# Altium PCB panel.PcbDoc
Units mm, origin at the board's own origin, x right, y up, seen from the top; angles counter-clockwise.
Board outline 51.11 x 36.66 mm, 2 copper layers (Top Layer, Bottom Layer); 23 components, 26 nets, 97 pads, 2 vias.
Unrouted connection lines stored in the file: 1.
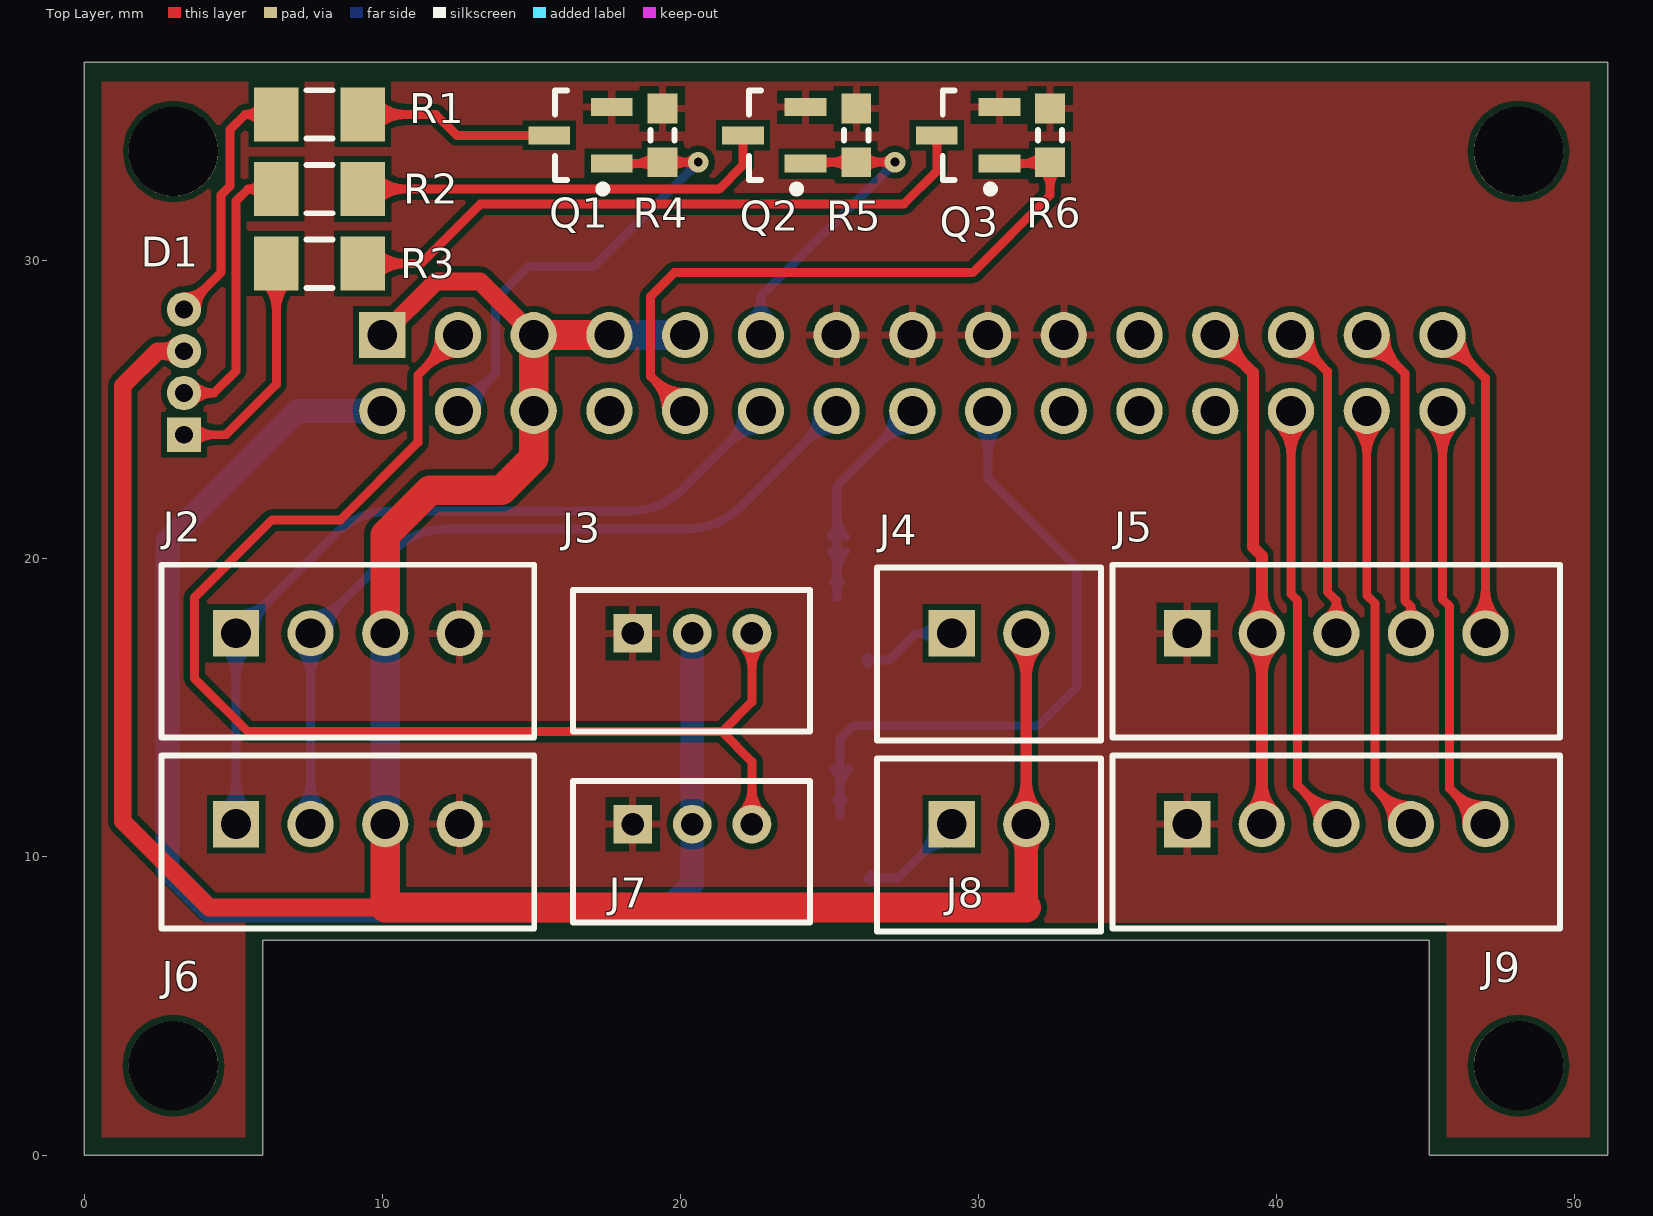
[diagram p0: Top Layer view]
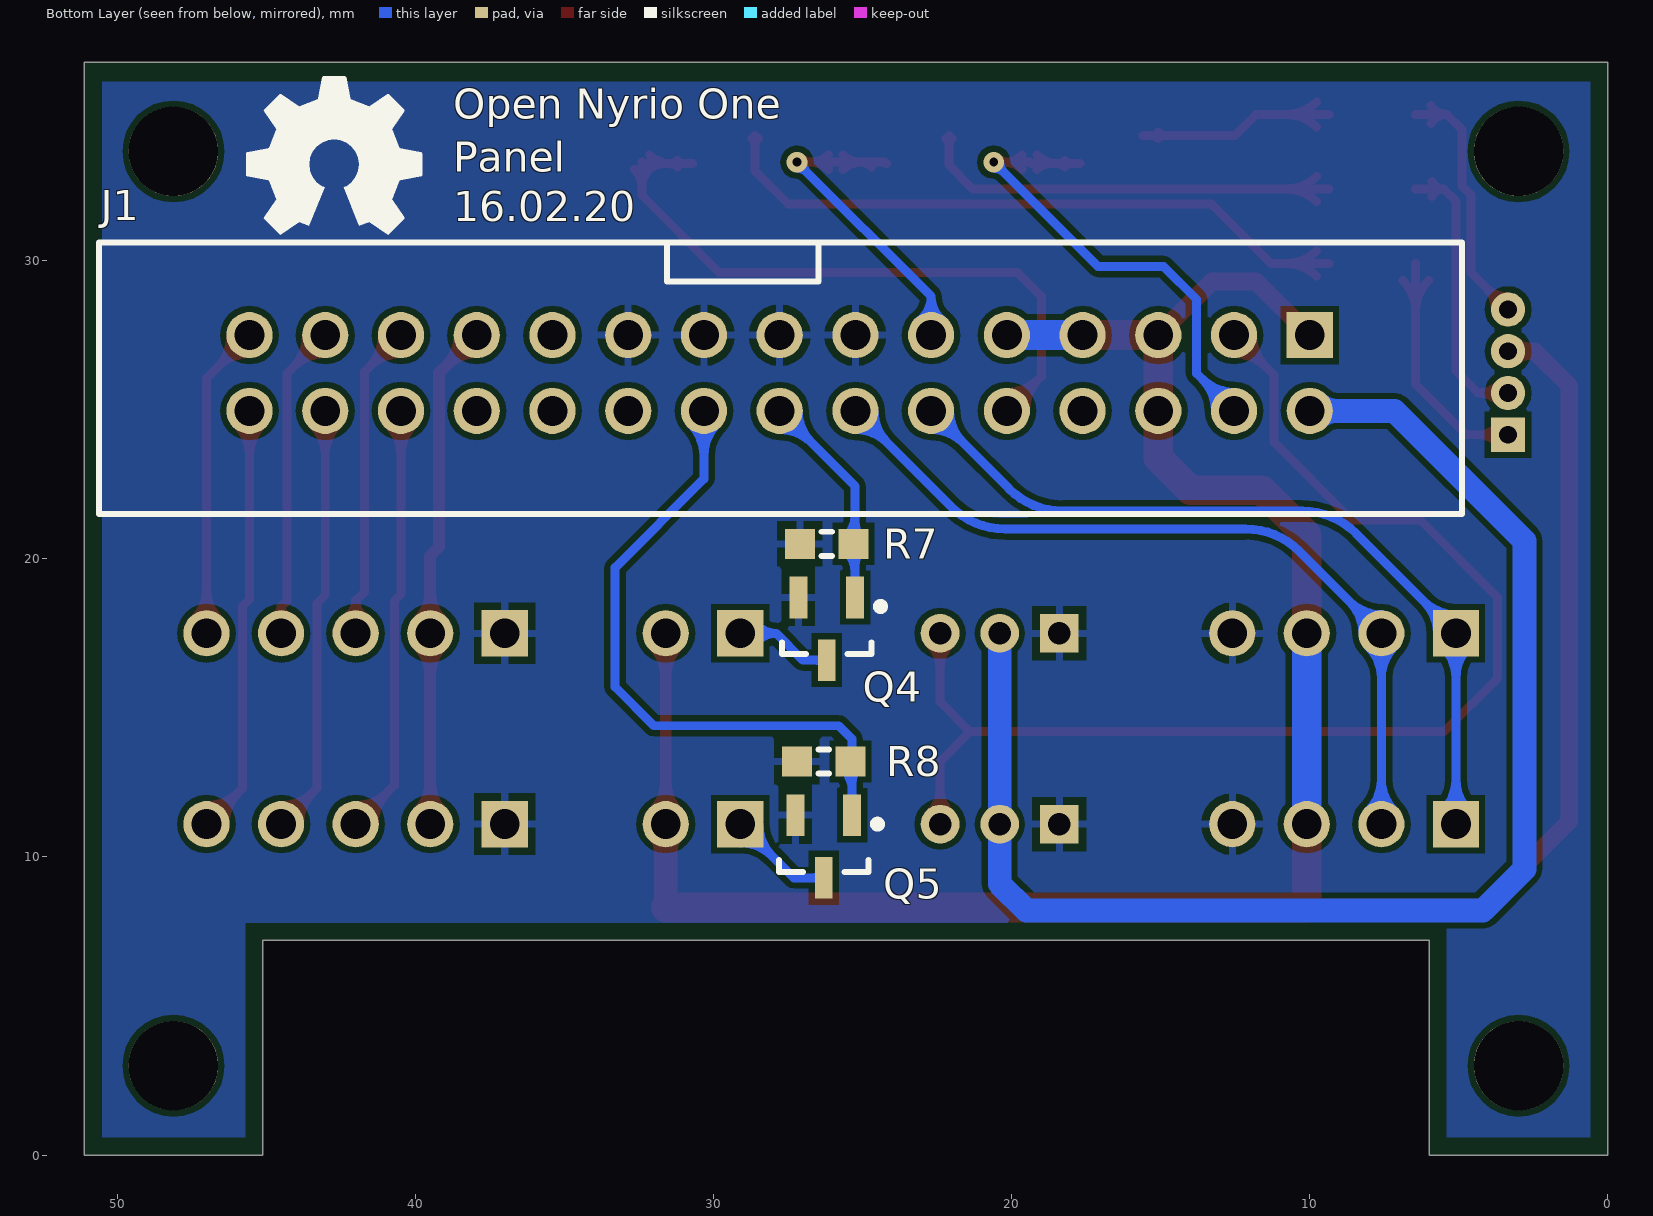
[diagram p1: Bottom Layer view, seen from below]
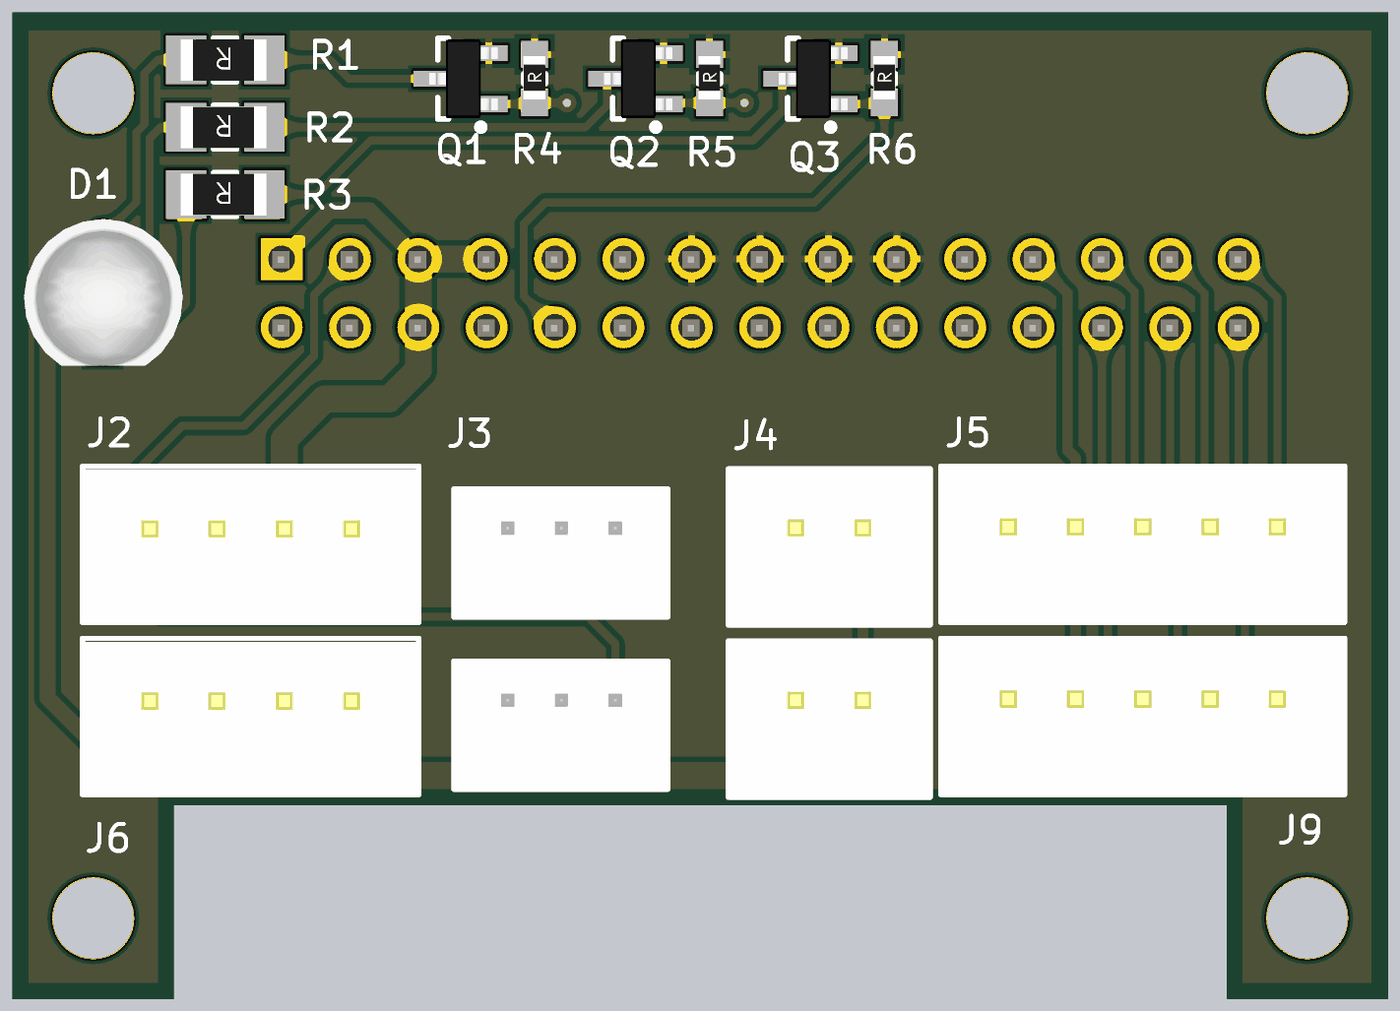
[diagram p2: 3D render of the assembled board from above, using the file's embedded part models]
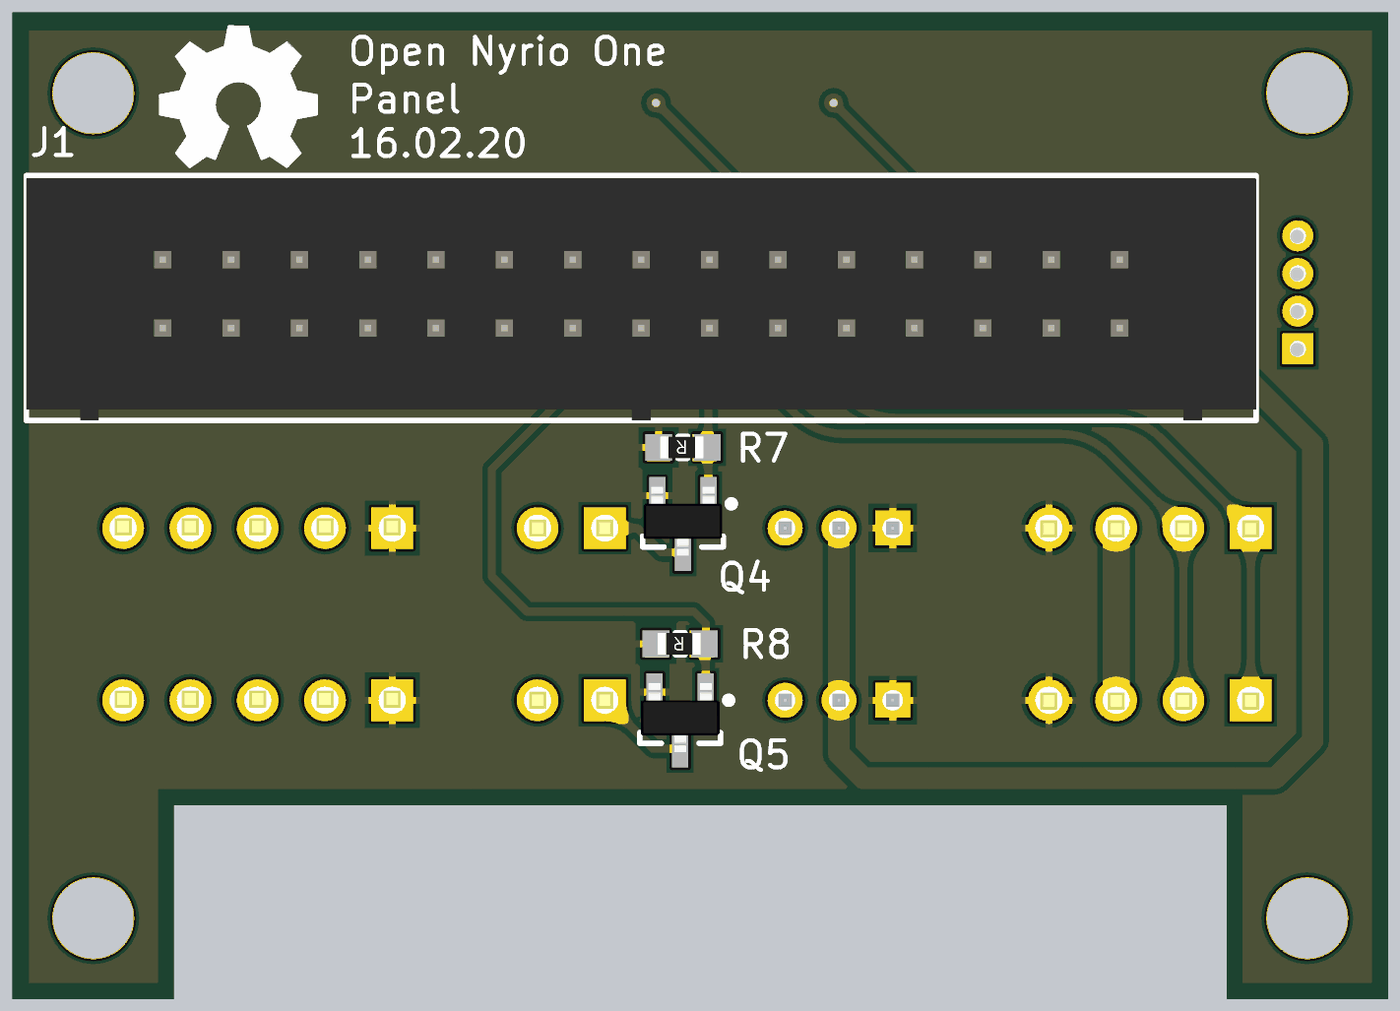
[diagram p3: 3D render of the assembled board from below, using the file's embedded part models]

## Layer stack, top to bottom
Top Layer: signal copper 0.0356
Dielectric: dielectric 0.32, FR-4, Dk 4.8
Bottom Layer: signal copper 0.0356

## Board outline
45.11,0 51.11,0 51.11,36.66 0,36.66 0,0 6,0 6,7.2 45.11,7.2

## Design rules (kind name [scope] priority, off if disabled: settings)
Clearance ViaToViaClearance [IsVia vs IsVia] p1: gap=0.2
Clearance PolyClearance [InPolygon] p2: gap=0.2
Clearance PadToPadClearance [IsPad vs IsPad] p3: gap=0.2
Clearance TrackToAllClearance [IsTrack] p4: gap=0.2
HoleSize [All] p1: absolutevalues=TRUE maxlimit=10 minlimit=0.025 maxpercent=80.000 minpercent=20.000
HoleToHoleClearance [All] p1: gap=0.2 allowstackedmicrovias=TRUE
MatchedLengths [All] p1: tolerance=25.4 checknetsindiffpair=TRUE checkdiffpairvsdiffpair=FALSE checkothers=FALSE
MinimumSolderMaskSliver [All] p1: minsoldermaskwidth=0.15
PolygonConnect [All] p1: connectstyle=Relief reliefconductorwidth=0.254 reliefentries=4 polygonreliefangle="90 Angle" airgapwidth=0.254
RoutingVias [All] p1: holewidth=0.3 width=0.6 viastyle="Through Hole" minholewidth=0.3 minwidth=0.6 maxholewidth=0.3 maxwidth=0.7
SilkToSilkClearance [All] p1: silktosilkclearance=0.2
SilkToSolderMaskClearance [IsPad] p1: minsilkscreentomaskgap=0.2 clearancetoexposedcopper=TRUE
SolderMaskExpansion [All] p1: expansion=0.1
Width [All] p1: maxlimit=10 minlimit=0.15 preferedwidth=0.5
23 further rules are at their usual default settings.

## Components (designator, comment, footprint, x,y, rotation, side; value= is the part's Value field where it differs from the comment)
D1 "LED-RGB-5mm" BL-L515 3.35,26.26 r90 top
J1 "BH-30" BH-30 10,27.5 r0 bottom
J2 "CWF-4" CWF-4 5.1,17.5 r0 top
J3 "CWF-3" DS1066-03 18.4,17.5 r0 top
J4 "CWF-2" CWF-2 29.1,17.5 r0 top
J5 "CWF-5" CWF-5 37,17.5 r0 top
J6 "CWF-4" CWF-4 5.1,11.1 r0 top
J7 "CWF-3" DS1066-03 18.4,11.1 r0 top
J8 "CWF-2" CWF-2 29.1,11.1 r0 top
J9 "CWF-5" CWF-5 37,11.1 r0 top
Q1 "IRLML6402" SOT23 16.5,34.2 r180 top
Q2 "IRLML6402" SOT23 23,34.2 r180 top
Q3 "IRLML6402" SOT23 29.5,34.2 r180 top
Q4 "IRLML6402" SOT23 26.2,17.5 r270 bottom
Q5 "IRLML6402" SOT23 26.3,10.2 r270 bottom
R1 "510" CHIP_R_1206 7.9,34.9 r180 top
R2 "430" CHIP_R_1206 7.9,32.4 r180 top
R3 "430" CHIP_R_1206 7.9,29.9 r180 top
R4 "10K" CHIP_R_0603 19.4,34.2 r90 top
R5 "10K" CHIP_R_0603 25.9,34.2 r90 top
R6 "10K" CHIP_R_0603 32.4,34.2 r90 top
R7 "10K" CHIP_R_0603 26.2,20.5 r0 bottom
R8 "10K" CHIP_R_0603 26.3,13.2 r0 bottom

## Footprints (in the part's own frame and the unit in brackets; to place one, negate y for a bottom-side part, rotate by r counter-clockwise, add the part's x,y. Pads: shape width x height; smd on the part's side, far side on the other; paste and mask are expansions set on the pad)
BH-30 [mm]
  rect 1.55x1.55 hole 1: 1(0,0)
  round 1.55 hole 1: 2(0,2.54) 3(2.54,0) 4(2.54,2.54) 5(5.08,0) 6(5.08,2.54) 7(7.62,0) 8(7.62,2.54) 9(10.16,0) 10(10.16,2.54) 11(12.7,0) 12(12.7,2.54) 13(15.24,0) 14(15.24,2.54) 15(17.78,0) 16(17.78,2.54) 17(20.32,0) 18(20.32,2.54) 19(22.86,0) 20(22.86,2.54) 21(25.4,0) 22(25.4,2.54) 23(27.94,0) 24(27.94,2.54) 25(30.48,0) 26(30.48,2.54) 27(33.02,0) 28(33.02,2.54) 29(35.56,0) 30(35.56,2.54)
  silkscreen extent -5.1,-3.1 40.6,6, body extent -5.1,-3 40.6,6, height 8.9
BL-L515 [mm]
  rect 1.15x1.15 hole 0.6: 1(-2.1,0)
  round 1.15 hole 0.6: 2(-0.7,0) 3(0.7,0) 4(2.1,0)
  body extent -2.72,-2.97 2.72,2.92, height 12.6
CHIP_R_0603 [mm] "CHIP_R_0603"
  rect 1x1 smd: 1(-0.9,0) 2(0.9,0)
  silkscreen extent -0.18,-0.41 0.18,0.41, body extent -1.26,-0.49 1.34,0.51, height 0.48
CHIP_R_1206 [mm] "CHIP_R_1206"
  rect 1.5x1.8 smd: 1(-1.45,0) 2(1.45,0)
  silkscreen extent -0.43,-0.81 0.43,0.81, body extent -2.04,-0.89 2.16,0.91, height 0.58
CWF-2 [mm]
  rect 1.55x1.55 hole 1: 1(0,0)
  round 1.55 hole 1: 2(2.5,0)
  silkscreen extent -2.5,-3.6 5,2.2, body extent -2.5,-3.55 5,2.2, height 7
CWF-4 [mm]
  rect 1.55x1.55 hole 1: 1(0,0)
  round 1.55 hole 1: 2(2.5,0) 3(5,0) 4(7.5,0)
  silkscreen extent -2.5,-3.5 10,2.3, body extent -2.4,-3.57 10,2.17, height 7
CWF-5 [mm]
  rect 1.55x1.55 hole 1: 1(0,0)
  round 1.55 hole 1: 2(2.5,0) 3(5,0) 4(7.5,0) 5(10,0)
  silkscreen extent -2.5,-3.5 12.5,2.3, body extent -2.5,-3.5 12.5,2.25, height 7
DS1066-03 [mm]
  rect 1.3x1.3 hole 0.75: 1(0,0)
  round 1.3 hole 0.75: 2(2,0) 3(4,0)
  silkscreen extent -2,-3.3 5.95,1.45, body extent -1.95,-3.35 5.95,1.45, height 6.2
SOT23 [mm] "SOT23, 3-Leads, Body 3,0x2,6mm (max), Pitch 0,95mm, IPC Medium Density"
  rect 1.4x0.6 smd: 1(-1.2,0.95) 2(-1.2,-0.95) 3(0.9,0)
  silkscreen extent -1.03,-1.5 0.7,1.92, body extent -1.53,-1.46 1.02,1.46, height 0.99

## Part data
J2 J4 J6 J8: "Connector"
J3 J7: library part CWF-3(R), "Conector"
Q1 Q2 Q3 Q4 Q5: "p-chanal MOSFET"
R1 R2 R3: library part RES_1206, "Resistor"
R4 R5 R6 R7 R8: library part RES_0603

## Free pads (board coordinates)
  round 3 hole 3: 1(3,3) 1(3,33.66) 1(48.11,33.66) 1(48.11,3)

## Via types
v1: diameter 0.7, hole 0.3, Top Layer to Bottom Layer, tented both sides, 2 vias

## Nets (pads, with @x,y where several pads share a name; then routed paths per layer and width w, separated by ;. In a path a pad name is that pad's centre, name@x,y a point inside that pad or via, vN(x,y) a via of type N, cw(c..) or ccw(c..) an arc to the next point about the centre after c; other vN are vias at no path point)
1A: J1.25 J5.3 | length 15.6
  Top Layer w0.3: J1.25@40.48,26.875 cw(c40.48,25.366) 41.547,26.433 cw(c42.614,27.5) J1.25@41.105,27.5 ; J1.25@40.48,27.175 cw(c40.48,26.39) 41.035,26.945 cw(c41.59,27.5) J1.25@40.805,27.5 ; J1.25 41.7,26.28 41.7,18.9 42,18.6 ; J5.3@41.68,18.037 ccw(c41.345,18.6) 42,18.6 ; J5.3 42,18.6 ; J5.3@42.32,18.037 cw(c42.655,18.6) 42,18.6
1B: J1.27 J5.4 | length 15
  Top Layer w0.3: J1.27@43.02,26.875 cw(c43.02,25.366) 44.087,26.433 cw(c45.154,27.5) J1.27@43.645,27.5 ; J1.27@43.02,27.175 cw(c43.02,26.39) 43.575,26.945 cw(c44.13,27.5) J1.27@43.345,27.5 ; J1.27 44.3,26.22 44.3,18.6 44.5,18.4 ; J5.4@44.282,18.086 ccw(c44.165,18.4) 44.5,18.4 ; J5.4 44.5,18.4 ; J5.4@44.718,18.086 cw(c44.835,18.4) 44.5,18.4
1C: J1.29 J5.5 | length 17.8
  Top Layer w0.3: J1.29@45.56,26.875 cw(c45.56,25.366) 46.627,26.433 cw(c47.694,27.5) J1.29@46.185,27.5 ; J1.29@45.56,27.175 cw(c45.56,26.39) 46.115,26.945 cw(c46.67,27.5) J1.29@45.885,27.5 ; J1.29 47,26.06 J5.5 ; J5.5@46.558,17.942 ccw(c45.491,19.009) 47,19.009 ccw(c48.509,19.009) J5.5@47.442,17.942 ; J5.5@46.77,17.73 ccw(c46.215,18.285) 47,18.285 ccw(c47.785,18.285) J5.5@47.23,17.73
2A: J1.26 J9.3 | length 21.7
  Top Layer w0.3: J1.26@40.038,24.518 cw(c38.971,23.451) 40.48,23.451 cw(c41.989,23.451) J1.26@40.922,24.518 ; J1.26@40.25,24.73 cw(c39.695,24.175) 40.48,24.175 cw(c41.265,24.175) J1.26@40.71,24.73 ; J1.26 40.48,18.81 40.7,18.59 40.7,12.4 J9.3 ; J9.3@41.375,11.1 ccw(c39.866,11.1) 40.933,12.167 ccw(c42,13.234) J9.3@42,11.725 ; J9.3@41.675,11.1 ccw(c40.89,11.1) 41.445,11.655 ccw(c42,12.21) J9.3@42,11.425
2B: J1.28 J9.4 | length 21.7
  Top Layer w0.3: J1.28@42.578,24.518 cw(c41.511,23.451) 43.02,23.451 cw(c44.529,23.451) J1.28@43.462,24.518 ; J1.28@42.79,24.73 cw(c42.235,24.175) 43.02,24.175 cw(c43.805,24.175) J1.28@43.25,24.73 ; J1.28 43.02,18.78 43.3,18.5 43.3,12.3 J9.4 ; J9.4@43.875,11.1 ccw(c42.366,11.1) 43.433,12.167 ccw(c44.5,13.234) J9.4@44.5,11.725 ; J9.4@44.175,11.1 ccw(c43.39,11.1) 43.945,11.655 ccw(c44.5,12.21) J9.4@44.5,11.425
2C: J1.30 J9.5 | length 21.7
  Top Layer w0.3: J1.30@45.118,24.518 cw(c44.051,23.451) 45.56,23.451 cw(c47.069,23.451) J1.30@46.002,24.518 ; J1.30@45.33,24.73 cw(c44.775,24.175) 45.56,24.175 cw(c46.345,24.175) J1.30@45.79,24.73 ; J1.30 45.56,18.64 45.8,18.4 45.8,12.3 J9.5 ; J9.5@46.375,11.1 ccw(c44.866,11.1) 45.933,12.167 ccw(c47,13.234) J9.5@47,11.725 ; J9.5@46.675,11.1 ccw(c45.89,11.1) 46.445,11.655 ccw(c47,12.21) J9.5@47,11.425
5V: J1.21 J1.23 J5.2 J9.2 | length 25.8
  Top Layer w0.4: J1.23@37.94,26.925 cw(c37.94,25.537) 38.922,26.518 cw(c39.903,27.5) J1.23@38.515,27.5 ; J1.23 39.2,26.24 39.2,20.4 39.5,20.1 J5.2 J9.2 ; J9.2@39.093,11.507 ccw(c38.112,12.488) 39.5,12.488 ccw(c40.888,12.488) J9.2@39.907,11.507 ; J5.2@39.093,17.093 cw(c38.112,16.112) 39.5,16.112 cw(c40.888,16.112) J5.2@39.907,17.093 ; J5.2@39.093,17.907 ccw(c38.112,18.888) 39.5,18.888 ccw(c40.888,18.888) J5.2@39.907,17.907
7V2: J1.2 J3.2 J7.2 | length 48.4
  Bottom Layer w0.8: J1.2@9.735,24.695 ccw(c9.095,24.055) 9.095,24.96 ccw(c9.095,25.865) J1.2@9.735,25.225 ; J1.2 7.16,24.96 2.8,20.6 2.8,9.6 4.2,8.2 19.5,8.2 20.4,9.1 J7.2 J3.2
12V: D1.3 J1.1 J1.5 J1.6 J1.7 J1.9 J2.3 J4.2 J6.3 J8.2 | length 99
  Top Layer w0.4: J8.2@31.193,11.507 ccw(c30.212,12.488) 31.6,12.488 ccw(c32.988,12.488) J8.2@32.007,11.507 ; J4.2@31.193,17.093 cw(c30.212,16.112) 31.6,16.112 cw(c32.988,16.112) J4.2@32.007,17.093 ; J8.2 J4.2
  Top Layer w0.6: D1.3@3.156,26.766 ccw(c2.686,26.296) 2.686,26.96 ccw(c2.686,27.624) D1.3@3.156,27.154 ; D1.3 2.46,26.96 1.3,25.8 1.3,11.2 4.2,8.3 10.1,8.3 ; J1.1 11.8,29.3 13.28,29.3 J1.5
  Top Layer w0.8: J8.2@31.335,10.835 cw(c30.695,10.195) 31.6,10.195 cw(c32.505,10.195) J8.2@31.865,10.835 ; 31.6,8.3 J8.2
  Top Layer w1: J6.3 10.1,8.3 31.6,8.3 ; J2.3 10.1,20.8 11.6,22.3 14,22.3 15.08,23.38 J1.6 J1.5 J1.7
  Bottom Layer w1: J6.3 J2.3 ; J1.7 J1.9
CANH: J1.14 J2.2 J6.2 | length 41.3
  Bottom Layer w0.3: J6.2@7.158,11.542 ccw(c6.091,12.609) 7.6,12.609 ccw(c9.109,12.609) J6.2@8.042,11.542 ; J2.2@7.158,17.058 cw(c6.091,15.991) 7.6,15.991 cw(c9.109,15.991) J2.2@8.042,17.058 ; J6.2@7.37,11.33 ccw(c6.815,11.885) 7.6,11.885 ccw(c8.385,11.885) J6.2@7.83,11.33 ; J2.2@7.37,17.27 cw(c6.815,16.715) 7.6,16.715 cw(c8.385,16.715) J2.2@7.83,17.27 ; J6.2 J2.2 10.356,20.256 cw(c12.152,18.46) 12.152,21 20.228,21 ccw(c20.228,23.54) 22.024,21.744 J1.14 ; J2.2@7.6,17.825 ccw(c7.6,18.61) 8.155,18.055 ccw(c8.71,17.5) J2.2@7.925,17.5 ; J2.2@7.6,18.125 ccw(c7.6,19.634) 8.667,18.567 ccw(c9.734,17.5) J2.2@8.225,17.5 ; J1.14@24.615,24.96 cw(c23.106,24.96) 24.173,23.893 cw(c25.24,22.826) J1.14@25.24,24.335 ; J1.14@24.915,24.96 cw(c24.13,24.96) 24.685,24.405 cw(c25.24,23.85) J1.14@25.24,24.635
CANL: J1.12 J2.1 J6.1 | length 41.3
  Bottom Layer w0.3: J6.1@4.658,11.542 ccw(c3.591,12.609) 5.1,12.609 ccw(c6.609,12.609) J6.1@5.542,11.542 ; J2.1@4.658,17.058 cw(c3.591,15.991) 5.1,15.991 cw(c6.609,15.991) J2.1@5.542,17.058 ; J6.1@4.87,11.33 ccw(c4.315,11.885) 5.1,11.885 ccw(c5.885,11.885) J6.1@5.33,11.33 ; J2.1@4.87,17.27 cw(c4.315,16.715) 5.1,16.715 cw(c5.885,16.715) J2.1@5.33,17.27 ; J6.1 J2.1 8.456,20.856 cw(c10.252,19.06) 10.252,21.6 18.288,21.6 ccw(c18.288,24.14) 20.084,22.344 J1.12 ; J2.1@5.1,17.825 ccw(c5.1,18.61) 5.655,18.055 ccw(c6.21,17.5) J2.1@5.425,17.5 ; J2.1@5.1,18.125 ccw(c5.1,19.634) 6.167,18.567 ccw(c7.234,17.5) J2.1@5.725,17.5 ; J1.12@22.075,24.96 cw(c20.566,24.96) 21.633,23.893 cw(c22.7,22.826) J1.12@22.7,24.335 ; J1.12@22.375,24.96 cw(c21.59,24.96) 22.145,24.405 cw(c22.7,23.85) J1.12@22.7,24.635
DLX-DATA: J1.3 J3.3 J7.3 | length 49.6
  Top Layer w0.3: J1.3@11.915,27.5 cw(c10.406,27.5) 11.473,26.433 cw(c12.54,25.366) J1.3@12.54,26.875 ; J1.3@12.215,27.5 cw(c11.43,27.5) 11.985,26.945 cw(c12.54,26.39) J1.3@12.54,27.175 ; J1.3 11.2,26.16 11.2,23.9 8.6,21.3 6.3,21.3 3.7,18.7 3.7,16 5.5,14.2 21.4,14.2 ; J7.3@22.046,11.454 ccw(c21.193,12.307) 22.4,12.307 ccw(c23.607,12.307) J7.3@22.754,11.454 ; J3.3@22.046,17.146 cw(c21.193,16.293) 22.4,16.293 cw(c23.607,16.293) J3.3@22.754,17.146 ; J7.3 22.4,13.2 21.4,14.2 ; J3.3 22.4,15.2 21.4,14.2
GND: J1.13 J1.15 J1.17 J1.19 J2.4 J3.1 J5.1 J6.4 J7.1 J9.1 Q1.2 Q2.2 Q3.2 Q4.2 Q5.2 R4.2 R5.2 R6.2 R7.2 R8.2
LED_B: J1.10 Q3.1 R6.1 | length 28.8
  Top Layer w0.3: J1.10@19.535,24.96 ccw(c18.026,24.96) 19.093,26.027 ccw(c20.16,27.094) J1.10@20.16,25.585 ; J1.10@19.835,24.96 ccw(c19.05,24.96) 19.605,25.515 ccw(c20.16,26.07) J1.10@20.16,25.285 ; J1.10 19,26.12 19,28.8 19.8,29.6 29.8,29.6 32.4,32.2 R6.1 cw(c32.279,33.421) 32.279,33.25 Q3.1 ; Q3.1@31.206,33.144 cw(c31.462,32.888) 31.462,33.25 cw(c31.462,33.612) Q3.1@31.206,33.356 ; 31.434,33.25 ccw(c31.434,34.266) R6.1@32.153,33.547 ; 31.676,33.25 cw(c31.676,32.576) 32.153,33.053 cw(c31.555,32.455) 32.4,32.455 cw(c33.245,32.455) R6.1@32.647,33.053
LED_G: J1.11 Q2.1 R5.1 | length 17.1
  Top Layer w0.3: Q2.1 24.25,33.3 R5.1 v1(27.2,33.3) ; Q2.1@24.706,33.144 cw(c25.083,32.767) 25.083,33.3 ; R5.1@25.653,33.053 ccw(c25.055,32.455) 25.055,33.3 ccw(c25.055,34.145) R5.1@25.653,33.547 ; R5.1@26.147,33.053 cw(c26.745,32.455) 26.745,33.3 cw(c26.745,34.145) R5.1@26.147,33.547 ; v1@27.059,33.159 ccw(c26.717,32.817) 26.717,33.3 ccw(c26.717,33.783) v1@27.059,33.441
  Bottom Layer w0.3: J1.11@22.31,27.988 ccw(c21.661,28.8) 22.7,28.8 ; J1.11 22.7,28.8 ; J1.11@23.09,27.988 cw(c23.739,28.8) 22.7,28.8 ; v1@27,33.3 cw(c26.517,33.3) 26.859,32.959 cw(c27.2,32.617) v1@27.2,33.1 ; v1(27.2,33.3) 22.7,28.8
LED_R: J1.4 Q1.1 R4.1 | length 24.2
  Top Layer w0.3: Q1.1 R4.1@19.35,33.25 ; Q1.1@18.206,33.144 cw(c18.462,32.888) 18.462,33.25 cw(c18.462,33.612) Q1.1@18.206,33.356 ; 18.434,33.25 ccw(c18.434,34.266) R4.1@19.153,33.547 ; 18.676,33.25 cw(c18.676,32.576) R4.1@19.153,33.053 ; R4.1 v1(20.6,33.3) ; R4.1@19.647,33.053 cw(c20.245,32.455) 20.245,33.3 cw(c20.245,34.145) R4.1@19.647,33.547 ; v1@20.459,33.159 ccw(c20.117,32.817) 20.117,33.3 ccw(c20.117,33.783) v1@20.459,33.441
  Bottom Layer w0.3: J1.4 13.8,26.22 13.8,28.7 14.9,29.8 17.1,29.8 v1(20.6,33.3) ; J1.4@12.54,25.285 ccw(c12.54,26.07) 13.095,25.515 ccw(c13.65,24.96) J1.4@12.865,24.96 ; J1.4@12.54,25.585 ccw(c12.54,27.094) 13.607,26.027 ccw(c14.674,24.96) J1.4@13.165,24.96 ; v1@20.4,33.3 cw(c19.917,33.3) 20.259,32.959 cw(c20.6,32.617) v1@20.6,33.1
NetD1_1: D1.1 R3.2 | length 11.7
  Top Layer w0.3: D1.1 4.76,24.16 6.45,25.85 R3.2 ; D1.1@3.651,23.859 cw(c4.376,23.134) 4.376,24.16 cw(c4.376,25.186) D1.1@3.651,24.461 ; R3.2@6.026,29.326 cw(c5.001,28.301) 6.45,28.301 cw(c7.899,28.301) R3.2@6.874,29.326
NetD1_2: D1.2 R2.2 | length 11.9
  Top Layer w0.3: D1.2 4.36,25.56 ; D1.2@3.654,25.263 cw(c4.36,24.573) 4.36,25.56 ; D1.2@3.654,25.857 ccw(c4.36,26.547) 4.36,25.56 ; R2.2@5.908,32.142 ccw(c5.5,31.948) 5.5,32.4 ; R2.2@5.908,32.658 cw(c5.5,32.852) 5.5,32.4 ; R2.2 5.5,32.4 ; 4.36,25.56 5.1,26.3 5.1,32 5.5,32.4
NetD1_4: D1.4 R1.2 | length 11.3
  Top Layer w0.3: D1.4 4.6,29.61 4.6,32.207 4.9,32.507 4.9,34.4 5.4,34.9 ; D1.4@3.35,28.785 ccw(c3.35,29.811) 4.076,29.086 ccw(c4.801,28.36) D1.4@3.775,28.36 ; R1.2@5.933,34.595 ccw(c5.4,34.281) 5.4,34.9 ; R1.2@5.933,35.205 cw(c5.4,35.519) 5.4,34.9 ; R1.2 5.4,34.9
NetJ4_1: J4.1 Q4.3 | length 5.5
  Bottom Layer w0.3: Q4.3 27,16.6 27.9,17.5 ; Q4.3@26.306,16.494 cw(c26.562,16.238) 26.562,16.6 cw(c26.562,16.962) Q4.3@26.306,16.706 ; J4.1@28.588,17.142 ccw(c27.9,16.661) 27.9,17.5 ; J4.1@28.588,17.858 cw(c27.9,18.339) 27.9,17.5 ; J4.1 27.9,17.5
NetJ8_1: J8.1 Q5.3 | length 7.7
  Bottom Layer w0.3: Q5.3 27.3,9.3 J8.1 ; Q5.3@26.406,9.194 cw(c26.662,8.938) 26.662,9.3 cw(c26.662,9.662) Q5.3@26.406,9.406 ; J8.1@28.475,11.1 cw(c26.966,11.1) 28.033,10.033 cw(c29.1,8.966) J8.1@29.1,10.475 ; J8.1@28.775,11.1 cw(c27.99,11.1) 28.545,10.545 cw(c29.1,9.99) J8.1@29.1,10.775
NetQ1_3: Q1.3 R1.1 | length 9.4
  Top Layer w0.3: R1.1 11.8,34.9 12.5,34.2 Q1.3 ; R1.1@9.774,34.476 cw(c10.799,33.451) 10.799,34.9 cw(c10.799,36.349) R1.1@9.774,35.324 ; Q1.3@15.094,34.094 ccw(c14.838,33.838) 14.838,34.2 ccw(c14.838,34.562) Q1.3@15.094,34.306
NetQ2_3: Q2.3 R2.1 | length 16.9
  Top Layer w0.3: R2.1 21.3,32.4 22.1,33.2 Q2.3 ; R2.1@9.774,31.976 cw(c10.799,30.951) 10.799,32.4 cw(c10.799,33.849) R2.1@9.774,32.824 ; Q2.3@21.994,34.094 cw(c21.738,33.838) 22.1,33.838 cw(c22.462,33.838) Q2.3@22.206,34.094
NetQ3_3: Q3.3 R3.1 | length 24.6
  Top Layer w0.3: R3.1 11.3,29.9 13.3,31.9 27.5,31.9 28.6,33 Q3.3 ; R3.1@9.774,29.476 cw(c10.799,28.451) 10.799,29.9 cw(c10.799,31.349) R3.1@9.774,30.324 ; Q3.3@28.494,34.094 cw(c28.238,33.838) 28.6,33.838 cw(c28.962,33.838) Q3.3@28.706,34.094
SW1: J1.16 Q4.1 R7.1 | length 14.1
  Bottom Layer w0.3: R7.1@25.053,20.253 cw(c24.576,19.776) 25.25,19.776 ; R7.1@25.053,20.747 ccw(c24.576,21.224) 25.25,21.224 ; Q4.1@25.144,19.206 ccw(c24.888,19.462) 25.25,19.462 ccw(c25.612,19.462) Q4.1@25.356,19.206 ; Q4.1 25.25,22.43 J1.16 ; 25.25,19.534 cw(c26.266,19.534) R7.1@25.547,20.253 ; 25.25,21.466 ccw(c26.266,21.466) R7.1@25.547,20.747 ; J1.16@27.155,24.96 cw(c25.646,24.96) 26.713,23.893 cw(c27.78,22.826) J1.16@27.78,24.335 ; J1.16@27.455,24.96 cw(c26.67,24.96) 27.225,24.405 cw(c27.78,23.85) J1.16@27.78,24.635
SW2: J1.18 Q5.1 R8.1 | length 27.3
  Bottom Layer w0.3: R8.1@25.153,12.953 cw(c24.676,12.476) 25.35,12.476 ; Q5.1@25.244,11.906 ccw(c24.988,12.162) 25.35,12.162 ccw(c25.712,12.162) Q5.1@25.456,11.906 ; Q5.1 R8.1@25.35,12.85 ; 25.35,12.234 cw(c26.366,12.234) R8.1@25.647,12.953 ; R8.1@25.4,12.9 R8.1@25.35,12.85 ; J1.18@29.878,24.518 cw(c28.811,23.451) 30.32,23.451 cw(c31.829,23.451) J1.18@30.762,24.518 ; J1.18@30.09,24.73 cw(c29.535,24.175) 30.32,24.175 cw(c31.105,24.175) J1.18@30.55,24.73 ; J1.18 30.32,22.68 33.3,19.7 33.3,15.7 32,14.4 25.8,14.4 25.35,13.95 R8.1@25.35,12.85
pads on no net: J1.8 J1.20 J1.22 J1.24

## Polygon pours and split planes (outlines as drawn)
GND on Top Layer "Top Layer-No Net" (solid, pour order 4): 0.6,0.6 5.4,0.6 5.4,7.8 45.7,7.8 45.7,6.2 45.7,0.6 50.5,0.6 50.5,36 0.6,36
GND on Bottom Layer "Top Layer-No Net" (solid, pour order 3): 0.6,0.6 5.4,0.6 5.4,7.8 45.7,7.8 45.7,6.2 45.7,0.6 50.5,0.6 50.5,36 0.6,36

## Silkscreen, mask and mechanical layers (free items; w line width, h text height)
Bottom Overlay:
  region: 43.109,36.172 43.118,36.15 43.117,36.15 43.253,35.442 43.262,35.42 43.277,35.414 43.87,35.169 43.884,35.163 43.906,35.172 43.905,35.172 44.502,35.577 44.524,35.586 44.553,35.574 44.551,35.572 45.063,35.064 45.075,35.035 45.066,35.013 44.661,34.417 44.652,34.395 44.658,34.38 44.904,33.787 44.91,33.773 44.931,33.764 44.932,33.764 45.64,33.629 45.661,33.62 45.673,33.59 45.67,33.59 45.673,32.869 45.661,32.84 45.64,32.831 45.639,32.832 44.931,32.696 44.91,32.687 44.904,32.672 44.658,32.079 44.652,32.065 44.661,32.043 44.662,32.043 45.066,31.447 45.075,31.425 45.063,31.396 45.061,31.398 44.553,30.886 44.524,30.873 44.502,30.883 44.503,30.883 43.906,31.288 43.884,31.297 43.87,31.291 43.598,31.178 43.583,31.172 43.554,31.184 43.548,31.199 43.048,32.423 43.042,32.438 43.054,32.467 43.068,32.472 43.14,32.501 43.314,32.635 43.447,32.809 43.531,33.012 43.56,33.23 43.531,33.447 43.447,33.65 43.314,33.824 43.14,33.958 42.937,34.042 42.719,34.071 42.501,34.042 42.299,33.958 42.124,33.824 41.991,33.65 41.907,33.447 41.878,33.23 41.907,33.012 41.991,32.809 42.124,32.635 42.299,32.501 42.37,32.472 42.384,32.467 42.396,32.438 42.39,32.423 41.89,31.199 41.884,31.184 41.855,31.172 41.84,31.178 41.569,31.291 41.554,31.297 41.532,31.288 41.533,31.287 40.936,30.883 40.914,30.873 40.885,30.886 40.887,30.888 40.375,31.396 40.363,31.425 40.372,31.447 40.373,31.446 40.777,32.043 40.786,32.065 40.78,32.079 40.535,32.672 40.529,32.687 40.507,32.696 40.507,32.695 39.799,32.831 39.777,32.84 39.765,32.869 39.768,32.869 39.765,33.59 39.777,33.62 39.799,33.629 39.799,33.628 40.507,33.764 40.529,33.773 40.535,33.787 40.78,34.38 40.786,34.395 40.777,34.417 40.776,34.416 40.372,35.013 40.363,35.035 40.375,35.064 40.377,35.061 40.885,35.574 40.914,35.586 40.936,35.577 40.936,35.576 41.532,35.172 41.554,35.163 41.569,35.169 42.162,35.414 42.176,35.42 42.185,35.442 42.184,35.442 42.32,36.15 42.329,36.172 42.358,36.184 42.358,36.181 43.08,36.184
  text "Open Nyrio One" at 38.735,34.75 h1
  text "Panel" at 38.735,32.972 h1
  text "16.02.20" at 38.735,31.321 h1
Mechanical 1:
  lines w0.1: 0,0 6,0 6,7.2 45.11,7.2 45.11,0 51.11,0 51.11,36.66 0,36.66 0,0
  lines w0.2: 1.855,7.2 1.855,20.2 50.155,20.2 ; 50.155,7.2 50.155,7.2 ; 50.155,7.2 50.155,20.2 ; 50.155,20.2 50.155,20.2